# Altium PCB ht66f319-24_evb.PcbDoc
Units mm, origin at the board's own origin, x right, y up, seen from the top; angles counter-clockwise.
Board outline 27.94 x 38.1 mm, 2 copper layers (Top Layer, Bottom Layer); 10 components, 24 nets, 90 pads, 6 vias.
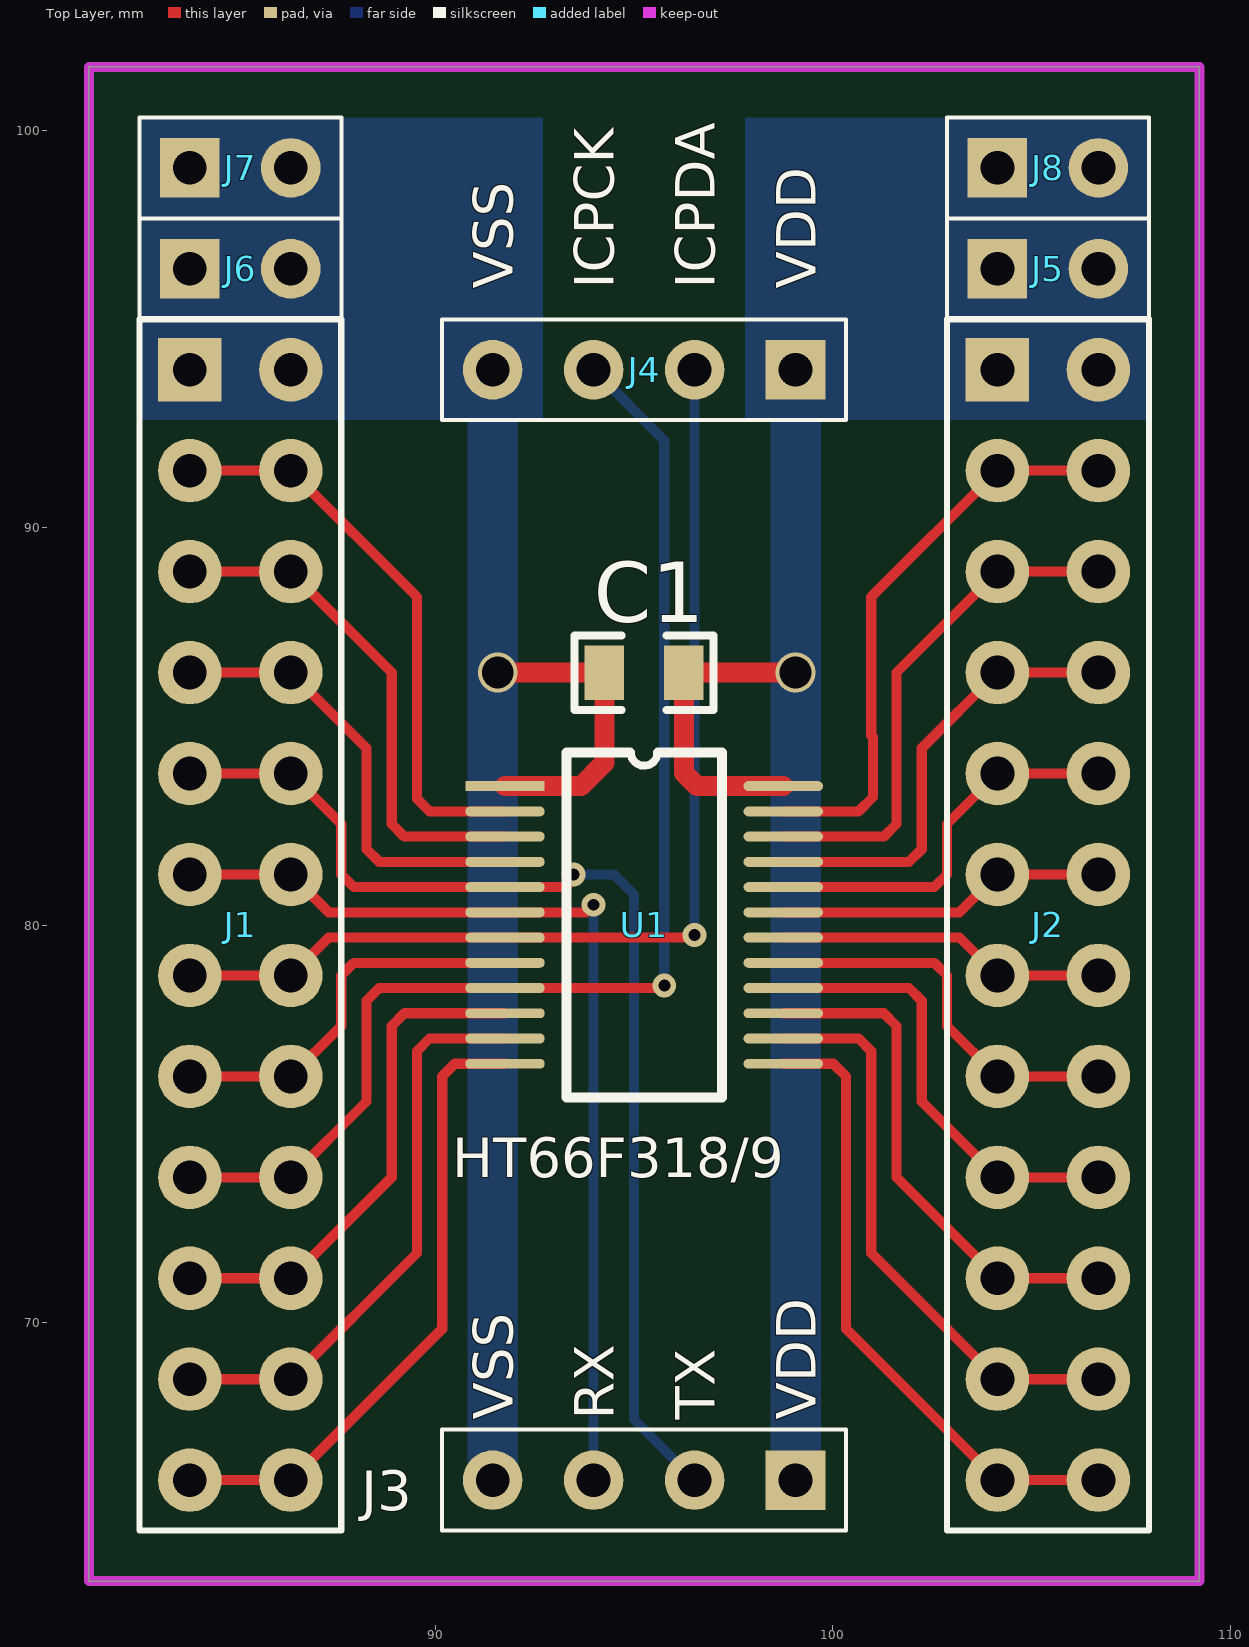
[diagram p0: Top Layer view]
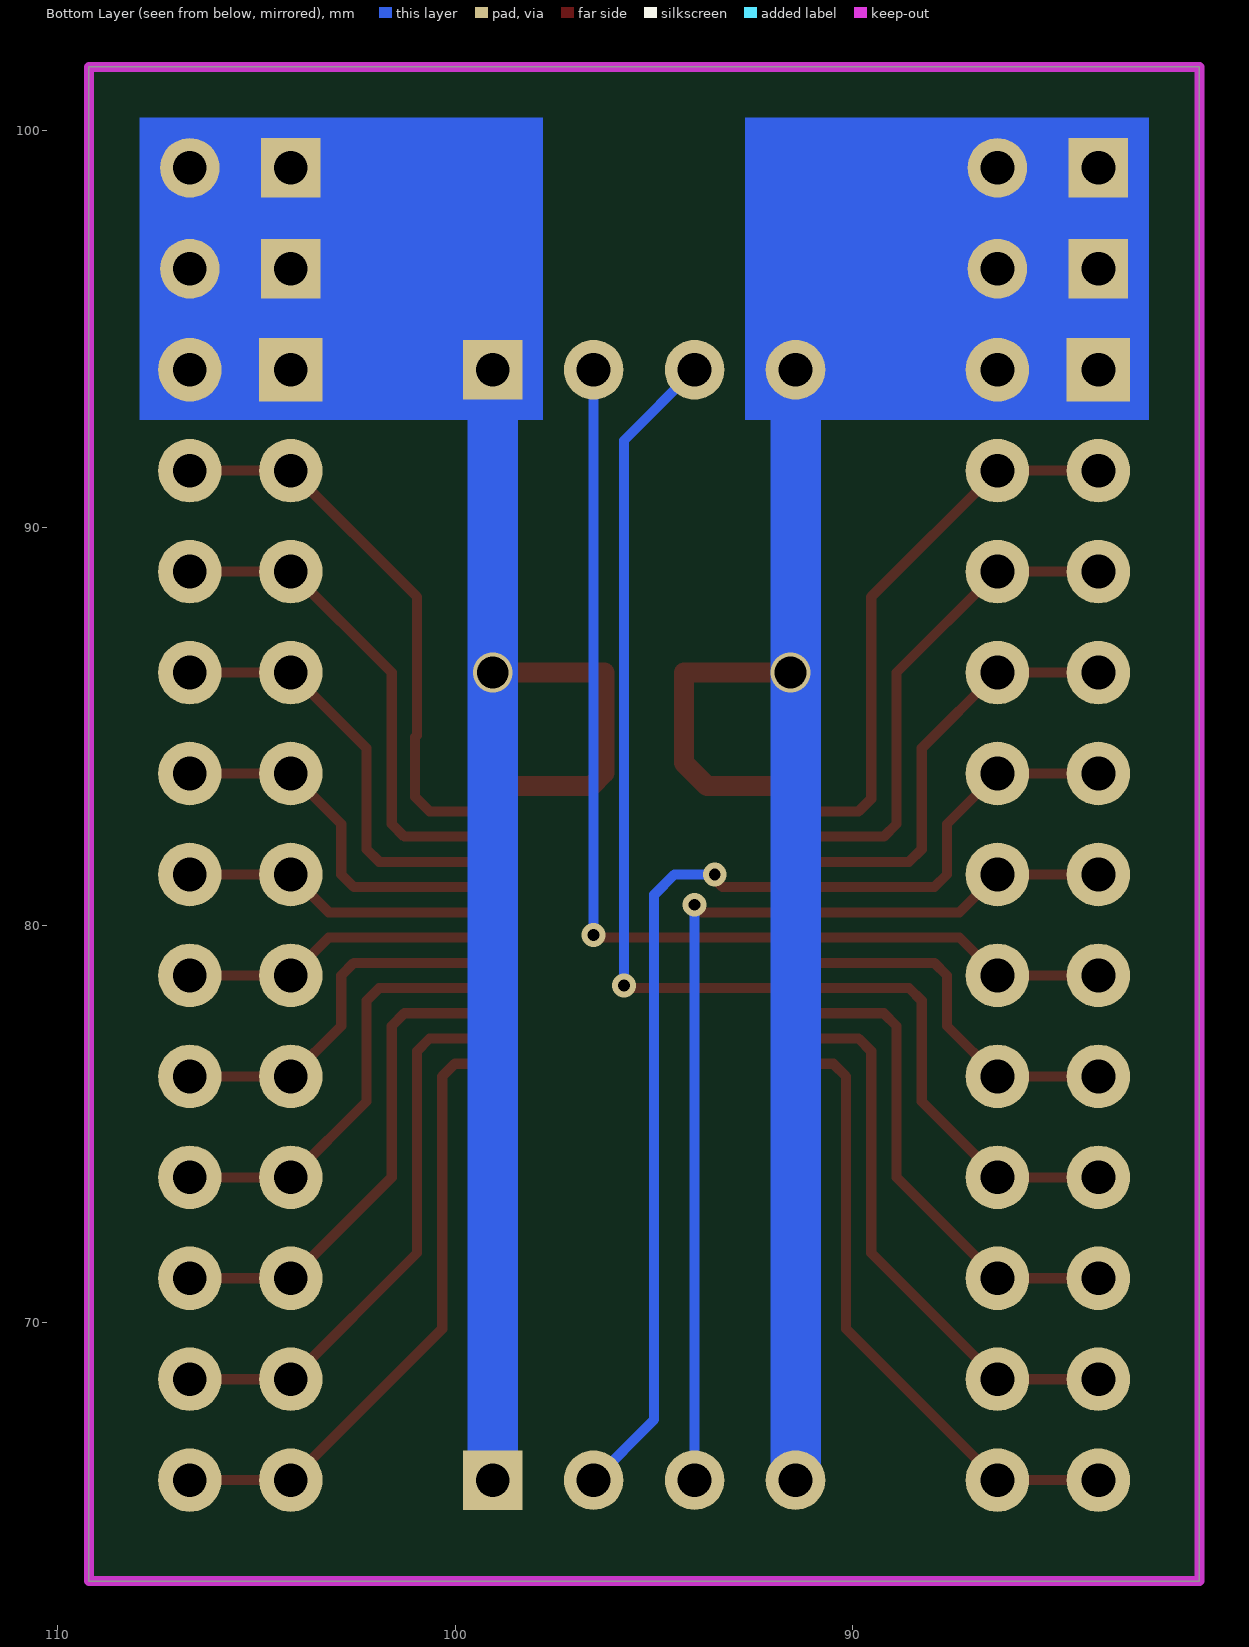
[diagram p1: Bottom Layer view, seen from below]

## Layer stack, top to bottom
Top Solder: solder mask 0.0102, Solder Resist, Dk 3.5
Top Layer: signal copper 0.0356
Dielectric 1: dielectric 0.32, FR-4, Dk 4.8
Bottom Layer: signal copper 0.0356
Bottom Solder: solder mask 0.0102, Solder Resist, Dk 3.5

## Board outline
81.28,63.5 81.28,101.6 109.22,101.6 109.22,63.5

## Design rules (kind name [scope] priority, off if disabled: settings)
Clearance [All] p1: gap=0.254
ComponentClearance [All] p1: gap=0 collisioncheckmode=3 verticalgap=0 showdistances=FALSE
PolygonConnect [All] p1: connectstyle=Relief reliefconductorwidth=0.254 reliefentries=4 polygonreliefangle="90 Angle" airgapwidth=0.254
RoutingVias [All] p1: holewidth=0.3 width=0.6 viastyle="Through Hole" minholewidth=0.3 minwidth=0.3 maxholewidth=2 maxwidth=2
SolderMaskExpansion [All] p1: expansion=0.102
Width [All] p1: maxlimit=2.54 minlimit=0.254 preferedwidth=0.254
29 further rules are at their usual default settings.

## Components (designator, comment, footprint, x,y, rotation, side; value= is the part's Value field where it differs from the comment)
C1 "10uF" C-0805 95.25,86.36 r0 top
J1 "CON12x2, 2.54mm" CON-12X2-DIP-2.54mm 83.82,93.98 r270 top
J2 "CON12x2, 2.54mm" CON-12X2-DIP-2.54mm 104.14,93.98 r270 top
J3 "CON4, 2.54mm" CON-4X1-DIP-2.54mm 99.06,66.04 r0 top
J4 "CON4, 2.54mm" CON-4X1-DIP-2.54mm 99.06,93.98 r0 top
J5 "CON2,2.5mm" CON-2X1-DIP-2.54mm 104.14,96.52 r180 top
J6 "CON2,2.5mm" CON-2X1-DIP-2.54mm 83.82,96.52 r180 top
J7 "CON2,2.5mm" CON-2X1-DIP-2.54mm 83.82,99.06 r180 top
J8 "CON2,2.5mm" CON-2X1-DIP-2.54mm 104.14,99.06 r180 top
U1 "HT66F319-24" SSO-24 95.25,80.01 r0 top

## Footprints (in the part's own frame and the unit in brackets; to place one, negate y for a bottom-side part, rotate by r counter-clockwise, add the part's x,y. Pads: shape width x height; smd on the part's side, far side on the other; paste and mask are expansions set on the pad)
C-0805 [mm]
  rect 1x1.375 smd: 1(-1,0) 2(1,0)
  silkscreen extent -1.75,-0.94 1.75,0.94, body extent -1,-0.62 1,0.63, height 0.78
CON-2X1-DIP-2.54mm [mm]
  rect 1.5x1.5 hole 0.85: 1(0,0)
  round 1.5 hole 0.85: 2(-2.54,0)
  silkscreen extent -3.81,-1.27 1.27,1.27
CON-4X1-DIP-2.54mm [mm]
  rect 1.5x1.5 hole 0.85: 1(0,0)
  round 1.5 hole 0.85: 2(-2.54,0) 3(-5.08,0) 4(-7.62,0)
  silkscreen extent -8.89,-1.27 1.27,1.27
CON-12X2-DIP-2.54mm [mm]
  rect 1.6x1.6 hole 0.85: 1(0,0)
  round 1.6 hole 0.85: 2(0,2.54) 3(2.54,0) 4(2.54,2.54) 5(5.08,0) 6(5.08,2.54) 7(7.62,0) 8(7.62,2.54) 9(10.16,0) 10(10.16,2.54) 11(12.7,0) 12(12.7,2.54) 13(15.24,0) 14(15.24,2.54) 15(17.78,0) 16(17.78,2.54) 17(20.32,0) 18(20.32,2.54) 19(22.86,0) 20(22.86,2.54) 21(25.4,0) 22(25.4,2.54) 23(27.94,0) 24(27.94,2.54)
  silkscreen extent -1.27,-1.27 29.21,3.81
SSO-24 [mm]
  rect 2x0.25 smd: 1(-3.5,3.492)
  oval 2x0.25 smd: 2(-3.5,2.857) 3(-3.5,2.222) 4(-3.5,1.587) 5(-3.5,0.953) 6(-3.5,0.318) 7(-3.5,-0.318) 8(-3.5,-0.953) 9(-3.5,-1.587) 10(-3.5,-2.222) 11(-3.5,-2.857) 12(-3.5,-3.492) 13(3.5,-3.492) 14(3.5,-2.857) 15(3.5,-2.222) 16(3.5,-1.587) 17(3.5,-0.953) 18(3.5,-0.318) 19(3.5,0.318) 20(3.5,0.953) 21(3.5,1.587) 22(3.5,2.222) 23(3.5,2.857) 24(3.5,3.492)
  silkscreen extent -1.96,-4.34 1.96,4.34

## Via types
v1: diameter 0.6, hole 0.3, Top Layer to Bottom Layer, tented both sides, 4 vias
v2: diameter 1, hole 0.8, Top Layer to Bottom Layer, tented both sides, 2 vias

## Nets (pads, with @x,y where several pads share a name; then routed paths per layer and width w, separated by ;. In a path a pad name is that pad's centre, name@x,y a point inside that pad or via, vN(x,y) a via of type N, cw(c..) or ccw(c..) an arc to the next point about the centre after c; other vN are vias at no path point)
ICPCK: J1.17 J1.18 J4.3 U1.9 | length 31.7
  Top Layer w0.254: J1.17 J1.18 88.265,75.565 88.265,78.105 88.582,78.422 U1.9 95.694,78.422 v1(95.758,78.486)
  Bottom Layer w0.254: J4.3 95.758,92.202 v1(95.758,78.486)
ICPDA: J1.13 J1.14 J4.2 U1.7 | length 27.3
  Top Layer w0.254: J1.13 J1.14 87.312,79.692 U1.7 96.456,79.692 v1(96.52,79.756)
  Bottom Layer w0.254: v1(96.52,79.756) J4.2
PA1: J1.15 J1.16 U1.8 | length 9.9
  Top Layer w0.254: J1.15 J1.16 87.63,77.47 87.63,78.74 87.947,79.057 U1.8
PA3: J1.19 J1.20 U1.10 | length 12.9
  Top Layer w0.254: J1.19 J1.20 88.9,73.66 88.9,77.47 89.218,77.787 U1.10
PA4: J2.13 J2.14 U1.18 | length 8.3
  Top Layer w0.254: U1.18 103.188,79.692 J2.13 J2.14
PA5: J2.15 J2.16 U1.17 | length 9.9
  Top Layer w0.254: U1.17 102.552,79.057 102.87,78.74 102.87,77.47 J2.15 J2.16
PA6: J2.17 J2.18 U1.16 | length 11.4
  Top Layer w0.254: U1.16 101.917,78.422 102.235,78.105 102.235,75.565 J2.17 J2.18
PA7: J2.19 J2.20 U1.15 | length 12.9
  Top Layer w0.254: U1.15 101.282,77.787 101.6,77.47 101.6,73.66 J2.19 J2.20
PB0: J2.3 J2.4 U1.23 | length 14.5
  Top Layer w0.254: U1.23 100.647,82.867 101.011,83.231 101.011,84.737 100.965,84.783 100.965,88.265 J2.3 J2.4
PB1: J2.5 J2.6 U1.22 | length 12.9
  Top Layer w0.254: U1.22 101.282,82.233 101.6,82.55 101.6,86.36 J2.5 J2.6
PB2: J2.7 J2.8 U1.21 | length 11.4
  Top Layer w0.254: U1.21 101.917,81.597 102.235,81.915 102.235,84.455 J2.7 J2.8
PB3: J2.21 J2.22 U1.14 | length 14.5
  Top Layer w0.254: U1.14 100.647,77.153 100.965,76.835 100.965,71.755 J2.21 J2.22
PB4: J2.23 J2.24 U1.13 | length 16
  Top Layer w0.254: U1.13 100.013,76.517 100.33,76.2 100.33,69.85 J2.23 J2.24
PB5: J1.23 J1.24 U1.12 | length 16
  Top Layer w0.254: J1.23 J1.24 90.17,69.85 90.17,76.2 90.487,76.517 U1.12
PB6: J1.21 J1.22 U1.11 | length 14.5
  Top Layer w0.254: J1.21 J1.22 89.535,71.755 89.535,76.835 89.852,77.153 U1.11
PC0: J1.3 J1.4 U1.2 | length 14.5
  Top Layer w0.254: J1.3 J1.4 89.535,88.265 89.535,83.185 89.852,82.867 U1.2
PC1: J1.5 J1.6 U1.3 | length 12.9
  Top Layer w0.254: J1.5 J1.6 88.9,86.36 88.9,82.55 89.218,82.233 U1.3
PC2: J1.7 J1.8 U1.4 | length 11.4
  Top Layer w0.254: J1.7 J1.8 88.265,84.455 88.265,81.915 88.582,81.597 U1.4
PC3: J1.9 J1.10 J3.2 U1.5 | length 28.9
  Top Layer w0.254: J1.9 J1.10 87.63,82.55 87.63,81.28 87.947,80.962 U1.5 93.281,80.962 93.472,81.153 v1(93.472,81.28)
  Bottom Layer w0.254: v1(93.472,81.28) 94.488,81.28 94.996,80.772 94.996,67.564 J3.2
PC4: J1.11 J1.12 J3.3 U1.6 | length 25.2
  Top Layer w0.254: J1.11 J1.12 87.312,80.328 U1.6 93.789,80.328 v1(93.98,80.518)
  Bottom Layer w0.254: J3.3 93.853,66.167 93.98,66.294 v1(93.98,80.518)
PC5: J2.11 J2.12 U1.19 | length 8.3
  Top Layer w0.254: U1.19 103.188,80.328 J2.11 J2.12
PC6: J2.9 J2.10 U1.20 | length 9.9
  Top Layer w0.254: U1.20 102.552,80.962 102.87,81.28 102.87,82.55 J2.9 J2.10
VDD: C1.2 J2.1 J2.2 J3.1 J4.1 J5.1 J5.2 J8.1 J8.2 U1.24 | length 43.5
  Top Layer w0.508: U1.24 96.584,83.502 96.25,83.836 C1.2 v2(99.06,86.36)
  Bottom Layer w1.27: J3.1 v2(99.06,86.36) J4.1 J2.1 J2.2
VSS: C1.1 J1.1 J1.2 J3.4 J4.4 J6.1 J6.2 J7.1 J7.2 U1.1 | length 43.3
  Top Layer w0.508: v2(91.567,86.36) C1.1 94.25,84.09 93.662,83.502 U1.1
  Bottom Layer w1.27: J1.1 J1.2 J4.4 J3.4

## Keep-outs
Keep-Out Layer:
  the board outline again, w0.254

## Other copper
Bottom Layer:
  rectangle net VDD: 97.79,92.71 107.95,100.33
  rectangle net VSS: 82.55,92.71 92.71,100.33

## Silkscreen, mask and mechanical layers (free items; w line width, h text height)
Top Overlay:
  text "VSS" at 91.948,96.012 h1 r90
  text "ICPCK" at 94.488,96.012 h1 r90
  text "ICPDA" at 97.028,96.012 h1 r90
  text "VDD" at 99.568,96.012 h1 r90
  text "HT66F318/9" at 90.424,73.66 h1
  text "VSS" at 91.948,67.564 h1 r90
  text "RX" at 94.488,67.564 h1 r90
  text "TX" at 97.028,67.564 h1 r90
  text "VDD" at 99.568,67.564 h1 r90